# Altium PCB COMMS_ECU_revA.PcbDoc (part 2 of 6)
Units mm, origin at the board's own origin, x right, y up, seen from the top; angles counter-clockwise.
Board outline 370 x 261 mm, 6 copper layers (Top Layer, Mid Layer 1, Mid Layer 2, Mid Layer 3, Mid Layer 4, Bottom Layer), stack 1.538 mm thick; 739 components, 500 nets, 2454 pads, 325 vias.
Unrouted connection lines stored in the file: 1573.
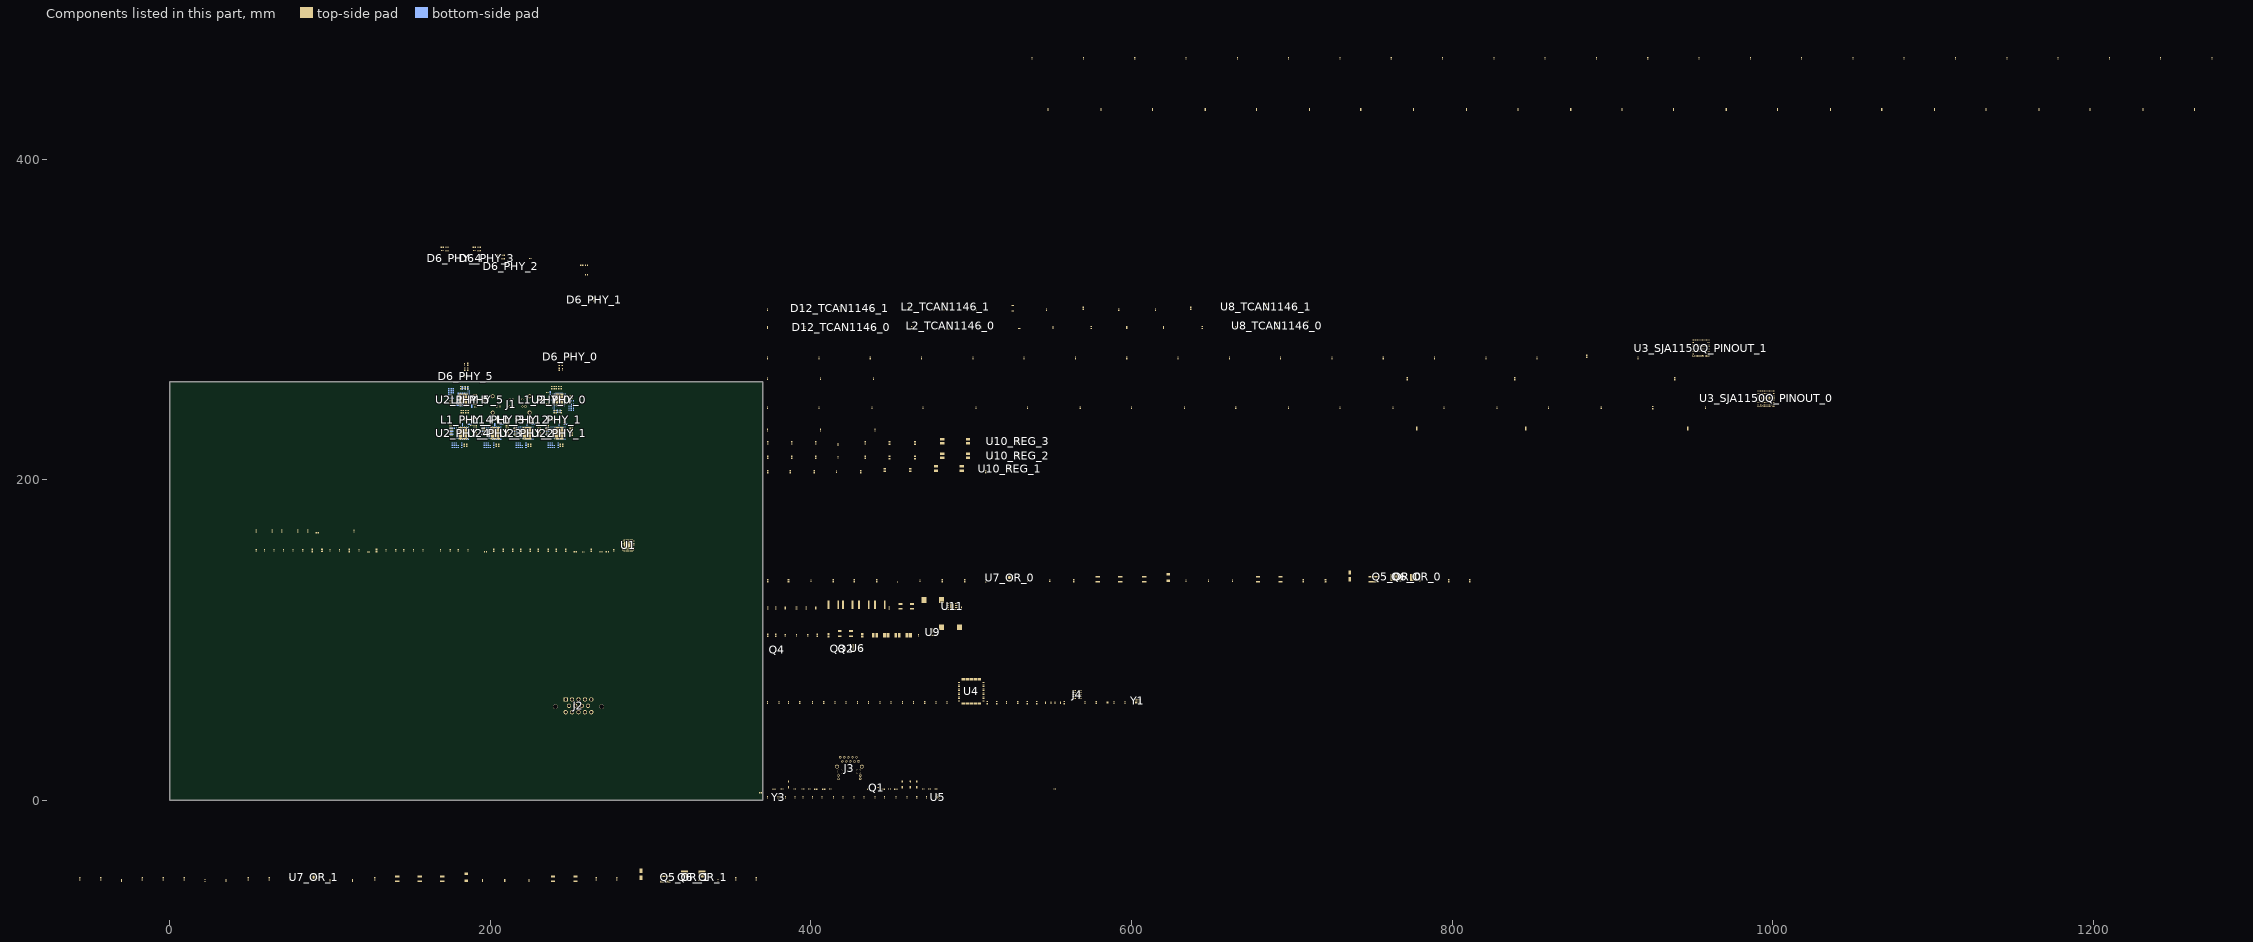
[diagram p2: the components of this part, seen from the top]

## Components (designator, comment, footprint, x,y, rotation, side; value= is the part's Value field where it differs from the comment) (continued)
C89_SJA1150Q_PINOUT_1 "100n" FP-0402-L_1_0_0_05-W_0_5-IPC_A 826.001,463.001 r90 top (schematic designator C89)
C90_SJA1150Q_PINOUT_0 "100n" FP-0402-L_1_0_0_05-W_0_5-IPC_A 874.001,431 r90 top (schematic designator C90)
C90_SJA1150Q_PINOUT_1 "100n" FP-0402-L_1_0_0_05-W_0_5-IPC_A 858.001,463.001 r90 top (schematic designator C90)
C91_SJA1150Q_PINOUT_0 "100n" FP-0402-L_1_0_0_05-W_0_5-IPC_A 906.001,431 r90 top (schematic designator C91)
C91_SJA1150Q_PINOUT_1 "100n" FP-0402-L_1_0_0_05-W_0_5-IPC_A 890.001,463.001 r90 top (schematic designator C91)
C92_SJA1150Q_PINOUT_0 "1u" FP-0402-L_1_0_0_05-W_0_5-IPC_A 678.001,431 r90 top (schematic designator C92)
C92_SJA1150Q_PINOUT_1 "1u" FP-0402-L_1_0_0_05-W_0_5-IPC_A 666.001,463.001 r90 top (schematic designator C92)
C93_SJA1150Q_PINOUT_0 "100n" FP-0402-L_1_0_0_05-W_0_5-IPC_A 711.001,431 r90 top (schematic designator C93)
C93_SJA1150Q_PINOUT_1 "100n" FP-0402-L_1_0_0_05-W_0_5-IPC_A 698.001,463.001 r90 top (schematic designator C93)
C94_SJA1150Q_PINOUT_0 "100n" FP-0402-L_1_0_0_05-W_0_5-IPC_A 743.001,431 r90 top (schematic designator C94)
C94_SJA1150Q_PINOUT_1 "100n" FP-0402-L_1_0_0_05-W_0_5-IPC_A 730.001,463.001 r90 top (schematic designator C94)
C95_SJA1150Q_PINOUT_0 "100n" FP-0402-L_1_0_0_05-W_0_5-IPC_A 776.001,431 r90 top (schematic designator C95)
C95_SJA1150Q_PINOUT_1 "100n" FP-0402-L_1_0_0_05-W_0_5-IPC_A 762.001,463.001 r90 top (schematic designator C95)
C96_SJA1150Q_PINOUT_0 "1u" FP-0402-L_1_0_0_05-W_0_5-IPC_A 548.001,431 r90 top (schematic designator C96)
C96_SJA1150Q_PINOUT_1 "1u" FP-0402-L_1_0_0_05-W_0_5-IPC_A 538.001,463.001 r90 top (schematic designator C96)
C97_SJA1150Q_PINOUT_0 "100n" FP-0402-L_1_0_0_05-W_0_5-IPC_A 581.001,431 r90 top (schematic designator C97)
C97_SJA1150Q_PINOUT_1 "100n" FP-0402-L_1_0_0_05-W_0_5-IPC_A 570.001,463.001 r90 top (schematic designator C97)
C98_SJA1150Q_PINOUT_0 "100n" FP-0402-L_1_0_0_05-W_0_5-IPC_A 613.001,431 r90 top (schematic designator C98)
C98_SJA1150Q_PINOUT_1 "100n" FP-0402-L_1_0_0_05-W_0_5-IPC_A 602.001,463.001 r90 top (schematic designator C98)
C99_SJA1150Q_PINOUT_0 "100n" FP-0402-L_1_0_0_05-W_0_5-IPC_A 646.001,431 r90 top (schematic designator C99)
C99_SJA1150Q_PINOUT_1 "100n" FP-0402-L_1_0_0_05-W_0_5-IPC_A 634.001,463.001 r90 top (schematic designator C99)
C100_SJA1150Q_PINOUT_0 "100n" FP-0402-L_1_0_0_05-W_0_5-IPC_A 373.001,231 r90 top (schematic designator C100)
C100_SJA1150Q_PINOUT_1 "100n" FP-0402-L_1_0_0_05-W_0_5-IPC_A 373.001,263.001 r90 top (schematic designator C100)
C101_SJA1150Q_PINOUT_0 "100n" FP-0402-L_1_0_0_05-W_0_5-IPC_A 406.001,231 r90 top (schematic designator C101)
C101_SJA1150Q_PINOUT_1 "100n" FP-0402-L_1_0_0_05-W_0_5-IPC_A 406.001,263.001 r90 top (schematic designator C101)
C102_SJA1150Q_PINOUT_0 "100n" FP-0402-L_1_0_0_05-W_0_5-IPC_A 440.001,231 r90 top (schematic designator C102)
C102_SJA1150Q_PINOUT_1 "100n" FP-0402-L_1_0_0_05-W_0_5-IPC_A 439.001,263.001 r90 top (schematic designator C102)
C110 "30p" FP-0402-L_1_0_0_05-W_0_5-IPC_A 589.001,61 r90 top
C111 "30p" FP-0402-L_1_0_0_05-W_0_5-IPC_A 596.001,61 r90 top
C112 "18p" FP-0402-L_1_0_0_05-W_0_5-IPC_A 571.001,61 r90 top
C113 "18p" FP-0402-L_1_0_0_05-W_0_5-IPC_A 578.001,61 r90 top
C114 "100n" FP-0402-L_1_0_0_05-W_0_5-IPC_A 522.001,61 r90 top
C115 "100n" FP-0402-L_1_0_0_05-W_0_5-IPC_A 529.001,61 r90 top
C116 "1u" FP-0402-L_1_0_0_05-W_0_5-IPC_A 478.001,61 r90 top
C117 "100n" FP-0402-L_1_0_0_05-W_0_5-IPC_A 485.001,61 r90 top
C118 "100n" FP-0402-L_1_0_0_05-W_0_5-IPC_A 471.001,61 r90 top
C119 "100n" FP-0402-L_1_0_0_05-W_0_5-IPC_A 464.001,61 r90 top
C120 "100n" FP-0402-L_1_0_0_05-W_0_5-IPC_A 450.001,61 r90 top
C121 "100n" FP-0402-L_1_0_0_05-W_0_5-IPC_A 443.001,61 r90 top
C122 "1u" FP-0402-L_1_0_0_05-W_0_5-IPC_A 429.001,61 r90 top
C123 "100n" FP-0402-L_1_0_0_05-W_0_5-IPC_A 436.001,61 r90 top
C124 "2.2u" FP-0402-L_1_0_0_05-W_0_5-IPC_A 415.001,61 r90 top
C125 "100n" FP-0402-L_1_0_0_05-W_0_5-IPC_A 422.001,61 r90 top
C126 "2.2u" FP-0402-L_1_0_0_05-W_0_5-IPC_A 401.001,61 r90 top
C127 "100n" FP-0402-L_1_0_0_05-W_0_5-IPC_A 408.001,61 r90 top
C128 "1u" FP-0402-L_1_0_0_05-W_0_5-IPC_A 386.001,61 r90 top
C129 "100n" FP-0402-L_1_0_0_05-W_0_5-IPC_A 393.001,61 r90 top
C130 "1u" FP-0402-L_1_0_0_05-W_0_5-IPC_A 373.001,61 r90 top
C131 "100n" FP-0402-L_1_0_0_05-W_0_5-IPC_A 380.001,61 r90 top
C132 "1u" FP-0402-L_1_0_0_05-W_0_5-IPC_A 446.001,2 r90 top
C133 "10n" FP-0402-L_1_0_0_05-W_0_5-IPC_A 453.001,2 r90 top
C134 "10n" FP-0402-L_1_0_0_05-W_0_5-IPC_A 433.001,2 r90 top
C135 "10n" FP-0402-L_1_0_0_05-W_0_5-IPC_A 420.001,2 r90 top
C136 "10n" FP-0402-L_1_0_0_05-W_0_5-IPC_A 407.001,2 r90 top
C137 "100n" FP-0402-L_1_0_0_05-W_0_5-IPC_A 373.001,2 r90 top
C138 "100n" FP-0402-L_1_0_0_05-W_0_5-IPC_A 115.001,168 r90 top
C139_OR_0 "EEE-FK1H100UR" FP-FKC-MFG 736.001,140 r90 top (schematic designator C139)
C139_OR_1 "EEE-FK1H100UR" FP-FKC-MFG 294.001,-46 r90 top (schematic designator C139)
C140_OR_0 "12103D106KAT2A" FP-1210-L_3_3_0_4-W_2_5_0-MFG 679.001,138 r90 top (schematic designator C140)
C140_OR_1 "12103D106KAT2A" FP-1210-L_3_3_0_4-W_2_5_0-MFG 239.001,-49 r90 top (schematic designator C140)
C141_OR_0 "12103D106KAT2A" FP-1210-L_3_3_0_4-W_2_5_0-MFG 693.001,138 r90 top (schematic designator C141)
C141_OR_1 "12103D106KAT2A" FP-1210-L_3_3_0_4-W_2_5_0-MFG 253.001,-49 r90 top (schematic designator C141)
C142_OR_0 "10n" FP-0402-L_1_0_0_05-W_0_5-IPC_A 663.001,137 r90 top (schematic designator C142)
C142_OR_1 "10n" FP-0402-L_1_0_0_05-W_0_5-IPC_A 224.001,-50 r90 top (schematic designator C142)
C143_OR_0 "100n" FP-0402-L_1_0_0_05-W_0_5-IPC_A 634.001,137 r90 top (schematic designator C143)
C143_OR_1 "100n" FP-0402-L_1_0_0_05-W_0_5-IPC_A 195.001,-50 r90 top (schematic designator C143)
C144_OR_0 "100n" FP-0402-L_1_0_0_05-W_0_5-IPC_A 648.001,137 r90 top (schematic designator C144)
C144_OR_1 "100n" FP-0402-L_1_0_0_05-W_0_5-IPC_A 209.001,-50 r90 top (schematic designator C144)
C145_OR_0 "AC1210KKX7R0BB104" FP-AC1210-0_85-MFG 579.001,138 r90 top value="100 nF" (schematic designator C145)
C145_OR_1 "AC1210KKX7R0BB104" FP-AC1210-0_85-MFG 142.001,-49 r90 top value="100 nF" (schematic designator C145)
C146_OR_0 "AC1210KKX7R0BB104" FP-AC1210-0_85-MFG 593.001,138 r90 top value="100 nF" (schematic designator C146)
C146_OR_1 "AC1210KKX7R0BB104" FP-AC1210-0_85-MFG 156.001,-49 r90 top value="100 nF" (schematic designator C146)
C147_OR_0 "AC1210KKX7R0BB104" FP-AC1210-0_85-MFG 608.001,138 r90 top value="100 nF" (schematic designator C147)
C147_OR_1 "AC1210KKX7R0BB104" FP-AC1210-0_85-MFG 170.001,-49 r90 top value="100 nF" (schematic designator C147)
C148_OR_0 "10n" FP-0402-L_1_0_0_05-W_0_5-IPC_A 549.001,137 r90 top (schematic designator C148)
C148_OR_1 "10n" FP-0402-L_1_0_0_05-W_0_5-IPC_A 114.001,-50 r90 top (schematic designator C148)
C149_OR_0 "10n" FP-0402-L_1_0_0_05-W_0_5-IPC_A 535.001,137 r90 top (schematic designator C149)
C149_OR_1 "10n" FP-0402-L_1_0_0_05-W_0_5-IPC_A 100.001,-50 r90 top (schematic designator C149)
C150_OR_0 "100n" FP-0402-L_1_0_0_05-W_0_5-IPC_A 468.001,137 r90 top (schematic designator C150)
C150_OR_1 "100n" FP-0402-L_1_0_0_05-W_0_5-IPC_A 35.001,-50 r90 top (schematic designator C150)
C151_OR_0 "100n" FP-0402-L_1_0_0_05-W_0_5-IPC_A 400.001,137 r90 top (schematic designator C151)
C151_OR_1 "100n" FP-0402-L_1_0_0_05-W_0_5-IPC_A -29.999,-50 r90 top (schematic designator C151)
C152_TCAN1146_0 "100n" FP-0402-L_1_0_0_05-W_0_5-IPC_A 665.001,295.001 r90 top (schematic designator C152)
C152_TCAN1146_1 "100n" FP-0402-L_1_0_0_05-W_0_5-IPC_A 659.001,306.001 r90 top (schematic designator C152)
C153_TCAN1146_0 "100n" FP-0402-L_1_0_0_05-W_0_5-IPC_A 597.001,295.001 r90 top (schematic designator C153)
C153_TCAN1146_1 "100n" FP-0402-L_1_0_0_05-W_0_5-IPC_A 592.001,306.001 r90 top (schematic designator C153)
C154_TCAN1146_0 "100n" FP-0402-L_1_0_0_05-W_0_5-IPC_A 620.001,295.001 r90 top (schematic designator C154)
C154_TCAN1146_1 "100n" FP-0402-L_1_0_0_05-W_0_5-IPC_A 615.001,306.001 r90 top (schematic designator C154)
C155_TCAN1146_0 "100n" FP-0402-L_1_0_0_05-W_0_5-IPC_A 551.001,295.001 r90 top (schematic designator C155)
C155_TCAN1146_1 "100n" FP-0402-L_1_0_0_05-W_0_5-IPC_A 547.001,306.001 r90 top (schematic designator C155)
C156_TCAN1146_0 "DNP" FP-0402-L_1_0_0_05-W_0_5-IPC_A 506.001,295.001 r90 top (schematic designator C156)
C156_TCAN1146_1 "DNP" FP-0402-L_1_0_0_05-W_0_5-IPC_A 503.001,306.001 r90 top (schematic designator C156)
C157_TCAN1146_0 "100n" FP-0402-L_1_0_0_05-W_0_5-IPC_A 440.001,295.001 r90 top (schematic designator C157)
C157_TCAN1146_1 "100n" FP-0402-L_1_0_0_05-W_0_5-IPC_A 438.001,306.001 r90 top (schematic designator C157)
C158_TCAN1146_0 "DNP" FP-0402-L_1_0_0_05-W_0_5-IPC_A 373.001,295.001 r90 top (schematic designator C158)
C158_TCAN1146_1 "DNP" FP-0402-L_1_0_0_05-W_0_5-IPC_A 373.001,306.001 r90 top (schematic designator C158)
C159 "100n" FP-0402-L_1_0_0_05-W_0_5-IPC_A 467.001,103 r90 top
C160 "GRM32ER61C476KE15L" FP-GRM32E-0_3-0_2-IPC_C 440.001,103 r0 top
C161 "GRM32ER61C476KE15L" FP-GRM32E-0_3-0_2-IPC_C 447.001,103 r0 top
C162 "GRM32ER61C476KE15L" FP-GRM32E-0_3-0_2-IPC_C 454.001,103 r0 top
C163 "DNP" FP-GRM32E-0_3-0_2-IPC_C 461.001,103 r0 top
C164 "C3225X7R1H106M250AC" FP-C3225-250-0_4-MFG 418.001,104 r90 top
C165 "C3225X7R1H106M250AC" FP-C3225-250-0_4-MFG 425.001,104 r90 top
C166 "08055C474J4Z2A" FP-0805-L_2_01_0_2-W_1_25-IPC_B 432.001,103 r90 top
C167 "08055C474J4Z2A" FP-0805-L_2_01_0_2-W_1_25-IPC_B 411.001,103 r90 top
C168 "100n" FP-0402-L_1_0_0_05-W_0_5-IPC_A 391.001,103 r90 top
C169 "1u" FP-0402-L_1_0_0_05-W_0_5-IPC_A 384.001,103 r90 top
C170_REG_1 "C0805C475J4RACAUTO" FP-C0805C475J4RACAUTO-MFG 446.001,206 r90 top (schematic designator C170)
C170_REG_2 "C0805C475J4RACAUTO" FP-C0805C475J4RACAUTO-MFG 449.001,214 r90 top (schematic designator C170)
C170_REG_3 "C0805C475J4RACAUTO" FP-C0805C475J4RACAUTO-MFG 449.001,223 r90 top (schematic designator C170)
C171_REG_1 "DNP" FP-C0805C475J4RACAUTO-MFG 462.001,206 r90 top (schematic designator C171)
C171_REG_2 "DNP" FP-C0805C475J4RACAUTO-MFG 465.001,214 r90 top (schematic designator C171)
C171_REG_3 "DNP" FP-C0805C475J4RACAUTO-MFG 465.001,223 r90 top (schematic designator C171)
C172_REG_1 "HMK325B7105KN-T" FP-1210-L_3_2_0_3-W_2_5_0-IPC_B 478.001,207 r90 top (schematic designator C172)
C172_REG_2 "HMK325B7105KN-T" FP-1210-L_3_2_0_3-W_2_5_0-IPC_B 482.001,215 r90 top (schematic designator C172)
C172_REG_3 "HMK325B7105KN-T" FP-1210-L_3_2_0_3-W_2_5_0-IPC_B 482.001,224 r90 top (schematic designator C172)
C173_REG_1 "DNP" FP-1210-L_3_2_0_3-W_2_5_0-IPC_B 494.001,207 r90 top (schematic designator C173)
C173_REG_2 "DNP" FP-1210-L_3_2_0_3-W_2_5_0-IPC_B 498.001,215 r90 top (schematic designator C173)
C173_REG_3 "DNP" FP-1210-L_3_2_0_3-W_2_5_0-IPC_B 498.001,224 r90 top (schematic designator C173)
C174_REG_1 "DNP" FP-0402-L_1_0_0_05-W_0_5-IPC_A 416.001,205 r90 top (schematic designator C174)
C174_REG_2 "DNP" FP-0402-L_1_0_0_05-W_0_5-IPC_A 417.001,214 r90 top (schematic designator C174)
C174_REG_3 "DNP" FP-0402-L_1_0_0_05-W_0_5-IPC_A 417.001,222 r90 top (schematic designator C174)
C175 "100n" FP-0402-L_1_0_0_05-W_0_5-IPC_A 494.001,120 r90 top
C176 "12103D106KAT2A" FP-1210-L_3_3_0_4-W_2_5_0-MFG 456.001,121 r90 top
C177 "12103D106KAT2A" FP-1210-L_3_3_0_4-W_2_5_0-MFG 463.001,121 r90 top
C178 "DNP" FP-0402-L_1_0_0_05-W_0_5-IPC_A 403.001,120 r90 top
C179 "CGA9N3X7R1C476M230KB" FP-CGA9P-IPC_A 414.001,122 r0 top
C180 "CGA9N3X7R1C476M230KB" FP-CGA9P-IPC_A 423.001,122 r0 top
C181 "CGA9N3X7R1C476M230KB" FP-CGA9P-IPC_A 433.001,122 r0 top
C182 "DNP" FP-CGA9P-IPC_A 443.001,122 r0 top
C183 "100n" FP-0402-L_1_0_0_05-W_0_5-IPC_A 384.001,120 r90 top
D1 "1N4148W-TP" FP-SOD-123-IPC_A 466.001,10 r90 top
D2 "1N4148W-TP" FP-SOD-123-IPC_A 462.001,10 r90 top
D3 "1N4148W-TP" FP-SOD-123-IPC_A 457.001,10 r90 top
D4 "MM5Z3V3T1G" ONSC-SOD-523-2-502-01_V 449.001,7 r0 top
D5 "1N4148W-TP" FP-SOD-123-IPC_A 386.001,10 r90 top
D6_PHY_0 "150066RG54050" WL-SBCD_0606 249.75,276.75 r90 top (schematic designator D6)
D6_PHY_1 "150066RG54050" WL-SBCD_0606 264.75,312.389 r0 top (schematic designator D6)
D6_PHY_2 "150066RG54050" WL-SBCD_0606 212.75,333.25 r0 top (schematic designator D6)
D6_PHY_3 "150066RG54050" WL-SBCD_0606 197.75,338.25 r0 top (schematic designator D6)
D6_PHY_4 "150066RG54050" WL-SBCD_0606 177.75,338.25 r0 top (schematic designator D6)
D6_PHY_5 "150066RG54050" WL-SBCD_0606 184.8,264.55 r270 top (schematic designator D6)
D7 "MM5Z3V3T1G" ONSC-SOD-523-2-502-01_V 76.001,167 r0 top
D8_OR_0 "DNP/MM5Z3V3T1G" ONSC-SOD-523-2-502-01_V 786.001,137 r90 top (schematic designator D8)
D8_OR_1 "DNP/MM5Z3V3T1G" ONSC-SOD-523-2-502-01_V 342.001,-50 r90 top (schematic designator D8)
D9_OR_0 "SMBJ33CA-TR" FP-SMB-CA-MFG 623.001,139 r90 top (schematic designator D9)
D9_OR_1 "SMBJ33CA-TR" FP-SMB-CA-MFG 185.001,-48 r90 top (schematic designator D9)
D10_OR_0 "DNP/MM5Z3V3T1G" ONSC-SOD-523-2-502-01_V 454.001,137 r90 top (schematic designator D10)
D10_OR_1 "DNP/MM5Z3V3T1G" ONSC-SOD-523-2-502-01_V 22.001,-50 r90 top (schematic designator D10)
D11_TCAN1146_0 "1N4148W-TP" FP-SOD-123-IPC_A 710.001,297.001 r90 top (schematic designator D11)
D11_TCAN1146_1 "1N4148W-TP" FP-SOD-123-IPC_A 702.001,308.001 r90 top (schematic designator D11)
D12_TCAN1146_0 "ESDCAN02-2BWY" FP-SOT323-3L-MFG 419.001,295.001 r90 top value=3pF (schematic designator D12)
D12_TCAN1146_1 "ESDCAN02-2BWY" FP-SOT323-3L-MFG 418.001,307.001 r90 top value=3pF (schematic designator D12)
FB3 "BLM18KG331SH1D" FP-BLM18-0_15-t0_8-IPC_B 129.001,156 r90 top
FB4 "BLM18KG331SH1D" FP-BLM18-0_15-t0_8-IPC_B 112.001,156 r90 top
FB5 "BLM18KG331SH1D" FP-BLM18-0_15-t0_8-IPC_B 89.001,156 r90 top
FB6_PHY_0 "BLM18KG331SH1D" FP-BLM18-0_15-t0_8-IPC_B 243.5,242.75 r90 bottom (schematic designator FB6)
FB6_PHY_1 "BLM18KG331SH1D" FP-BLM18-0_15-t0_8-IPC_B 235.75,228.5 r0 bottom (schematic designator FB6)
FB6_PHY_2 "BLM18KG331SH1D" FP-BLM18-0_15-t0_8-IPC_B 215.75,228.5 r0 bottom (schematic designator FB6)
FB6_PHY_3 "BLM18KG331SH1D" FP-BLM18-0_15-t0_8-IPC_B 195.75,228.5 r0 bottom (schematic designator FB6)
FB6_PHY_4 "BLM18KG331SH1D" FP-BLM18-0_15-t0_8-IPC_B 175.75,228.5 r0 bottom (schematic designator FB6)
FB6_PHY_5 "BLM18KG331SH1D" FP-BLM18-0_15-t0_8-IPC_B 182.5,257.25 r270 bottom (schematic designator FB6)
FB8_PHY_0 "BLM18KG331SH1D" FP-BLM18-0_15-t0_8-IPC_B 241.75,242.75 r90 bottom (schematic designator FB8)
FB8_PHY_1 "BLM18KG331SH1D" FP-BLM18-0_15-t0_8-IPC_B 235.75,230.25 r0 bottom (schematic designator FB8)
FB8_PHY_2 "BLM18KG331SH1D" FP-BLM18-0_15-t0_8-IPC_B 215.75,230.25 r0 bottom (schematic designator FB8)
FB8_PHY_3 "BLM18KG331SH1D" FP-BLM18-0_15-t0_8-IPC_B 195.75,230.25 r0 bottom (schematic designator FB8)
FB8_PHY_4 "BLM18KG331SH1D" FP-BLM18-0_15-t0_8-IPC_B 175.75,230.25 r0 bottom (schematic designator FB8)
FB8_PHY_5 "BLM18KG331SH1D" FP-BLM18-0_15-t0_8-IPC_B 184.25,257.25 r270 bottom (schematic designator FB8)
FB10_PHY_0 "BLM18KG331SH1D" FP-BLM18-0_15-t0_8-IPC_B 237.5,254 r270 bottom (schematic designator FB10)
FB10_PHY_1 "BLM18KG331SH1D" FP-BLM18-0_15-t0_8-IPC_B 247,234.5 r180 bottom (schematic designator FB10)
FB10_PHY_2 "BLM18KG331SH1D" FP-BLM18-0_15-t0_8-IPC_B 227,234.5 r180 bottom (schematic designator FB10)
FB10_PHY_3 "BLM18KG331SH1D" FP-BLM18-0_15-t0_8-IPC_B 207,234.5 r180 bottom (schematic designator FB10)
FB10_PHY_4 "BLM18KG331SH1D" FP-BLM18-0_15-t0_8-IPC_B 187,234.5 r180 bottom (schematic designator FB10)
FB10_PHY_5 "BLM18KG331SH1D" FP-BLM18-0_15-t0_8-IPC_B 188.5,246 r90 bottom (schematic designator FB10)
FB11_PHY_0 "BLM18KG331SH1D" FP-BLM18-0_15-t0_8-IPC_B 240,242.75 r90 bottom (schematic designator FB11)
FB11_PHY_1 "BLM18KG331SH1D" FP-BLM18-0_15-t0_8-IPC_B 235.75,232 r0 bottom (schematic designator FB11)
FB11_PHY_2 "BLM18KG331SH1D" FP-BLM18-0_15-t0_8-IPC_B 215.75,232 r0 bottom (schematic designator FB11)
FB11_PHY_3 "BLM18KG331SH1D" FP-BLM18-0_15-t0_8-IPC_B 195.75,232 r0 bottom (schematic designator FB11)
FB11_PHY_4 "BLM18KG331SH1D" FP-BLM18-0_15-t0_8-IPC_B 175.75,232 r0 bottom (schematic designator FB11)
FB11_PHY_5 "BLM18KG331SH1D" FP-BLM18-0_15-t0_8-IPC_B 186,257.25 r270 bottom (schematic designator FB11)
FB13_SJA1150Q_PINOUT_0 "BLM18KG331SH1D" FP-BLM18-0_15-t0_8-IPC_B 947.001,232 r90 top (schematic designator FB13)
FB13_SJA1150Q_PINOUT_1 "BLM18KG331SH1D" FP-BLM18-0_15-t0_8-IPC_B 939.001,263.001 r90 top (schematic designator FB13)
FB16_SJA1150Q_PINOUT_0 "BLM18KG331SH1D" FP-BLM18-0_15-t0_8-IPC_B 846.001,232 r90 top (schematic designator FB16)
FB16_SJA1150Q_PINOUT_1 "BLM18KG331SH1D" FP-BLM18-0_15-t0_8-IPC_B 839.001,263.001 r90 top (schematic designator FB16)
FB19_SJA1150Q_PINOUT_0 "BLM18KG331SH1D" FP-BLM18-0_15-t0_8-IPC_B 778.001,232 r90 top (schematic designator FB19)
FB19_SJA1150Q_PINOUT_1 "BLM18KG331SH1D" FP-BLM18-0_15-t0_8-IPC_B 772.001,263.001 r90 top (schematic designator FB19)
FB23 "BLM15PX601SN1D" FP-BLM15-0_05-IPC_A 457.001,61 r90 top
J1 "E6S20F-40MT5-A" FP-E6S20F-40MT5-A-MFG 213,251 r180 top
J2 "776266-1" 776266-1-Footprint-1 255,59 r0 top
J3 "RJMG201K21120FR" RJMG201K21120FR-Footprint-1 424.001,18 r0 top
J4 "3220-10-0300-00" 3220-10-0300-00-Footprint-1 566.001,66 r0 top
L1_PHY_0 "ACT1210G-800-2P-TL10" FP-ACT1210G-800-2P-TL10-MFG 234,250 r180 top (schematic designator L1)
L1_PHY_1 "ACT1210G-800-2P-TL10" FP-ACT1210G-800-2P-TL10-MFG 240.5,237.5 r180 top (schematic designator L1)
L1_PHY_2 "ACT1210G-800-2P-TL10" FP-ACT1210G-800-2P-TL10-MFG 220.5,237.5 r180 top (schematic designator L1)
L1_PHY_3 "ACT1210G-800-2P-TL10" FP-ACT1210G-800-2P-TL10-MFG 205.5,237.5 r0 top (schematic designator L1)
L1_PHY_4 "ACT1210G-800-2P-TL10" FP-ACT1210G-800-2P-TL10-MFG 185.5,237.5 r0 top (schematic designator L1)
L1_PHY_5 "ACT1210G-800-2P-TL10" FP-ACT1210G-800-2P-TL10-MFG 192,250 r0 top (schematic designator L1)
L2_TCAN1146_0 "SRF4532-510Y" FP-SRF4532-MFG 487.001,296.001 r90 top (schematic designator L2)
L2_TCAN1146_1 "SRF4532-510Y" FP-SRF4532-MFG 484.001,308.001 r90 top (schematic designator L2)
L3 "74437377022" WE-LHMI_1335 487.001,108 r0 top
L4 "74437377022" WE-LHMI_1335 476.001,125 r0 top
Q1 "BSS138W-7-F" DIOD-SOT323-3_V 441.001,8 r0 top
Q2 "SISH615ADN-T1-GE3" SISH615ADN-T1-GE3-Footprint-1 422.001,95 r0 top
Q3 "SISH615ADN-T1-GE3" SISH615ADN-T1-GE3-Footprint-1 417.001,95 r0 top
Q4 "BSS138W-7-F" DIOD-SOT323-3_V 379.001,94 r0 top
Q5_OR_0 "ISC011N06LM5ATMA1" FP-PG-TDSON-8-MFG 765.001,139 r90 top (schematic designator Q5)
Q5_OR_1 "ISC011N06LM5ATMA1" FP-PG-TDSON-8-MFG 321.001,-47 r0 top (schematic designator Q5)
Q6_OR_0 "ISC011N06LM5ATMA1" FP-PG-TDSON-8-MFG 777.001,139 r90 top (schematic designator Q6)
Q6_OR_1 "ISC011N06LM5ATMA1" FP-PG-TDSON-8-MFG 332.001,-47 r0 top (schematic designator Q6)
R1 "100k" R0603B 453.001,7 r0 top
R2 "1k" R0603B 445.001,7 r0 top
R3 "100k" R0603B 436.001,7 r0 top
R4 "1k" R0603B 408.001,7 r0 top
R5 "1k" R0603B 403.001,7 r0 top
R6 "1k" R0603B 377.001,7 r0 top
R7 "1k" R0603B 368.75,4.75 r0 top
R8 "100k" R0603B 273.001,155 r0 top
R9 "4.7k" R0603B 269.001,155 r0 top
R10 "DNP" R0603B 263.001,156 r90 top
R11 "4.7k" R0603B 253.001,155 r0 top
R12 "DNP" R0603B 247.001,156 r90 top
R13 "4.7k" R0603B 241.001,156 r90 top
R14 "1k" R0603B 236.001,156 r90 top
R15 "DNP" R0603B 230.001,156 r90 top
R16 "1k" R0603B 225.001,156 r90 top
R17 "1k" R0603B 219.001,156 r90 top
R18 "1k" R0603B 214.001,156 r90 top
R19 "1k" R0603B 208.001,156 r90 top
R20 "1k" R0603B 202.001,156 r90 top
R21 "1k" R0603B 197.001,155 r0 top
R22 "6.04k" R0603B 95.001,156 r90 top
R23_PHY_0 "1k" R0603B 243.001,271.979 r90 top value=100k (schematic designator R23)
R23_PHY_1 "1k" R0603B 259.979,333.885 r0 top value=100k (schematic designator R23)
R23_PHY_2 "1k" R0603B 207.979,339.999 r0 top value=100k (schematic designator R23)
R23_PHY_3 "1k" R0603B 192.979,344.999 r0 top value=100k (schematic designator R23)
R23_PHY_4 "1k" R0603B 172.979,344.999 r0 top value=100k (schematic designator R23)
R23_PHY_5 "1k" R0603B 185.999,269.021 r270 top value=100k (schematic designator R23)
R24_PHY_0 "1k" R0603B 245,271.979 r90 top value=100k (schematic designator R24)
R24_PHY_1 "1k" R0603B 259.979,327.889 r0 top value=100k (schematic designator R24)
R24_PHY_2 "1k" R0603B 207.979,338 r0 top value=100k (schematic designator R24)
R24_PHY_3 "1k" R0603B 192.979,343 r0 top value=100k (schematic designator R24)
R24_PHY_4 "1k" R0603B 172.979,343 r0 top value=100k (schematic designator R24)
R24_PHY_5 "1k" R0603B 184,269.021 r270 top value=100k (schematic designator R24)
R25_PHY_0 "100k" R0603B 243,268.979 r90 top (schematic designator R25)
R25_PHY_1 "100k" R0603B 256.979,333.889 r0 top (schematic designator R25)
R25_PHY_2 "100k" R0603B 204.979,340 r0 top (schematic designator R25)
R25_PHY_3 "100k" R0603B 189.979,345 r0 top (schematic designator R25)
R25_PHY_4 "100k" R0603B 169.979,345 r0 top (schematic designator R25)
R25_PHY_5 "100k" R0603B 186,272.021 r270 top (schematic designator R25)
R26_PHY_0 "100k" R0603B 238.25,257.5 r270 top (schematic designator R26)
R26_PHY_1 "100k" R0603B 246,236.5 r270 top (schematic designator R26)
R26_PHY_2 "100k" R0603B 226,236.5 r270 top (schematic designator R26)
R26_PHY_3 "100k" R0603B 210.5,233.75 r180 top (schematic designator R26)
R26_PHY_4 "100k" R0603B 190.5,233.75 r180 top (schematic designator R26)
R26_PHY_5 "100k" R0603B 190.5,247 r180 top (schematic designator R26)
R27_PHY_0 "100k" R0603B 241.25,242.5 r270 top (schematic designator R27)
R27_PHY_1 "100k" R0603B 235.5,230.75 r180 top (schematic designator R27)
R27_PHY_2 "100k" R0603B 215.5,230.75 r180 top (schematic designator R27)
R27_PHY_3 "100k" R0603B 195.5,230.75 r180 top (schematic designator R27)
R27_PHY_4 "100k" R0603B 175.5,230.75 r180 top (schematic designator R27)
R27_PHY_5 "100k" R0603B 184.5,257.5 r90 top (schematic designator R27)
R28_PHY_0 "4.7k" R0603B 244.25,242.5 r270 top value=100k (schematic designator R28)
R28_PHY_1 "4.7k" R0603B 235.5,227.75 r180 top value=100k (schematic designator R28)
R28_PHY_2 "4.7k" R0603B 215.5,227.75 r180 top value=100k (schematic designator R28)
R28_PHY_3 "4.7k" R0603B 195.5,227.75 r180 top value=100k (schematic designator R28)
R28_PHY_4 "4.7k" R0603B 175.5,227.75 r180 top value=100k (schematic designator R28)
R28_PHY_5 "4.7k" R0603B 181.5,257.5 r90 top value=100k (schematic designator R28)
R29_PHY_0 "10k" R0603B 239.75,257.5 r90 top value=100k (schematic designator R29)
R29_PHY_1 "10k" R0603B 250.5,232.25 r0 top value=100k (schematic designator R29)
R29_PHY_2 "10k" R0603B 230.5,232.25 r0 top value=100k (schematic designator R29)
R29_PHY_3 "10k" R0603B 210.5,232.25 r0 top value=100k (schematic designator R29)
R29_PHY_4 "10k" R0603B 190.5,232.25 r0 top value=100k (schematic designator R29)
R29_PHY_5 "10k" R0603B 186.25,242.5 r270 top value=100k (schematic designator R29)
R30_PHY_0 "10k" R0603B 249.75,249.25 r0 bottom value=100k (schematic designator R30)
R30_PHY_1 "10k" R0603B 242.25,222.25 r270 bottom value=100k (schematic designator R30)
R30_PHY_2 "10k" R0603B 222.25,222.25 r270 bottom value=100k (schematic designator R30)
R30_PHY_3 "10k" R0603B 202.25,222.25 r270 bottom value=100k (schematic designator R30)
R30_PHY_4 "10k" R0603B 182.25,222.25 r270 bottom value=100k (schematic designator R30)
R30_PHY_5 "10k" R0603B 176.25,250.75 r180 bottom value=100k (schematic designator R30)
R31_PHY_0 "10k" R0603B 249.75,245.75 r180 bottom value=100k (schematic designator R31)
R31_PHY_1 "10k" R0603B 238.75,222.25 r90 bottom value=100k (schematic designator R31)
R31_PHY_2 "10k" R0603B 218.75,222.25 r90 bottom value=100k (schematic designator R31)
R31_PHY_3 "10k" R0603B 198.75,222.25 r90 bottom value=100k (schematic designator R31)
R31_PHY_4 "10k" R0603B 178.75,222.25 r90 bottom value=100k (schematic designator R31)
R31_PHY_5 "10k" R0603B 176.25,254.25 r0 bottom value=100k (schematic designator R31)
R32_PHY_0 "10k" R0603B 249.75,244.5 r180 bottom value=100k (schematic designator R32)
R32_PHY_1 "10k" R0603B 237.5,222.25 r90 bottom value=100k (schematic designator R32)
R32_PHY_2 "10k" R0603B 217.5,222.25 r90 bottom value=100k (schematic designator R32)
R32_PHY_3 "10k" R0603B 197.5,222.25 r90 bottom value=100k (schematic designator R32)
R32_PHY_4 "10k" R0603B 177.5,222.25 r90 bottom value=100k (schematic designator R32)
R32_PHY_5 "10k" R0603B 176.25,255.5 r0 bottom value=100k (schematic designator R32)
R33_PHY_0 "1k" R0603B 242.75,257.5 r270 top value=100k (schematic designator R33)
R33_PHY_1 "1k" R0603B 250.5,229.25 r180 top value=100k (schematic designator R33)
R33_PHY_2 "1k" R0603B 230.5,229.25 r180 top value=100k (schematic designator R33)
R33_PHY_3 "1k" R0603B 210.5,229.25 r180 top value=100k (schematic designator R33)
R33_PHY_4 "1k" R0603B 190.5,229.25 r180 top value=100k (schematic designator R33)
R33_PHY_5 "1k" R0603B 183.25,242.5 r90 top value=100k (schematic designator R33)
R34_PHY_0 "DNP" R0603B 251.25,245.75 r0 bottom (schematic designator R34)
R34_PHY_1 "DNP" R0603B 238.75,220.75 r270 bottom (schematic designator R34)
R34_PHY_2 "DNP" R0603B 218.75,220.75 r270 bottom (schematic designator R34)
R34_PHY_3 "DNP" R0603B 198.75,220.75 r270 bottom (schematic designator R34)
R34_PHY_4 "DNP" R0603B 178.75,220.75 r270 bottom (schematic designator R34)
R34_PHY_5 "DNP" R0603B 174.75,254.25 r180 bottom (schematic designator R34)
R35_PHY_0 "10k" R0603B 249.75,243.25 r180 bottom value=100k (schematic designator R35)
R35_PHY_1 "10k" R0603B 236.25,222.25 r90 bottom value=100k (schematic designator R35)
R35_PHY_2 "10k" R0603B 216.25,222.25 r90 bottom value=100k (schematic designator R35)
R35_PHY_3 "10k" R0603B 196.25,222.25 r90 bottom value=100k (schematic designator R35)
R35_PHY_4 "10k" R0603B 176.25,222.25 r90 bottom value=100k (schematic designator R35)
R35_PHY_5 "10k" R0603B 176.25,256.75 r0 bottom value=100k (schematic designator R35)
R36_PHY_0 "1k" R0603B 244.25,257.5 r270 top value=100k (schematic designator R36)
R36_PHY_1 "1k" R0603B 250.5,227.75 r180 top value=100k (schematic designator R36)
R36_PHY_2 "1k" R0603B 230.5,227.75 r180 top value=100k (schematic designator R36)
R36_PHY_3 "1k" R0603B 210.5,227.75 r180 top value=100k (schematic designator R36)
R36_PHY_4 "1k" R0603B 190.5,227.75 r180 top value=100k (schematic designator R36)
R36_PHY_5 "1k" R0603B 181.75,242.5 r90 top value=100k (schematic designator R36)
R37_PHY_0 "DNP" R0603B 251.25,249.25 r0 bottom (schematic designator R37)
R37_PHY_1 "DNP" R0603B 242.25,220.75 r270 bottom (schematic designator R37)
R37_PHY_2 "DNP" R0603B 222.25,220.75 r270 bottom (schematic designator R37)
R37_PHY_3 "DNP" R0603B 202.25,220.75 r270 bottom (schematic designator R37)
R37_PHY_4 "DNP" R0603B 182.25,220.75 r270 bottom (schematic designator R37)
R37_PHY_5 "DNP" R0603B 174.75,250.75 r180 bottom (schematic designator R37)
R38_PHY_0 "10k" R0603B 250.5,250.75 r0 top value=100k (schematic designator R38)
R38_PHY_1 "10k" R0603B 243.75,221.5 r270 top value=100k (schematic designator R38)
R38_PHY_2 "10k" R0603B 223.75,221.5 r270 top value=100k (schematic designator R38)
R38_PHY_3 "10k" R0603B 203.75,221.5 r270 top value=100k (schematic designator R38)
R38_PHY_4 "10k" R0603B 183.75,221.5 r270 top value=100k (schematic designator R38)
R38_PHY_5 "10k" R0603B 175.5,249.25 r180 top value=100k (schematic designator R38)
R39_PHY_0 "DNP" R0603B 251.25,243.25 r0 bottom (schematic designator R39)
R39_PHY_1 "DNP" R0603B 236.25,220.75 r270 bottom (schematic designator R39)
R39_PHY_2 "DNP" R0603B 216.25,220.75 r270 bottom (schematic designator R39)
R39_PHY_3 "DNP" R0603B 196.25,220.75 r270 bottom (schematic designator R39)
R39_PHY_4 "DNP" R0603B 176.25,220.75 r270 bottom (schematic designator R39)
R39_PHY_5 "DNP" R0603B 174.75,256.75 r180 bottom (schematic designator R39)
R40_PHY_0 "DNP" R0603B 241.25,257.5 r90 top (schematic designator R40)
R40_PHY_1 "DNP" R0603B 250.5,230.75 r0 top (schematic designator R40)
R40_PHY_2 "DNP" R0603B 230.5,230.75 r0 top (schematic designator R40)
R40_PHY_3 "DNP" R0603B 210.5,230.75 r0 top (schematic designator R40)
R40_PHY_4 "DNP" R0603B 190.5,230.75 r0 top (schematic designator R40)
R40_PHY_5 "DNP" R0603B 184.75,242.5 r270 top (schematic designator R40)
R41_PHY_0 "1k" R0603B 251.25,247 r180 bottom value=100k (schematic designator R41)
R41_PHY_1 "1k" R0603B 240,220.75 r90 bottom value=100k (schematic designator R41)
R41_PHY_2 "1k" R0603B 220,220.75 r90 bottom value=100k (schematic designator R41)
R41_PHY_3 "1k" R0603B 200,220.75 r90 bottom value=100k (schematic designator R41)
R41_PHY_4 "1k" R0603B 180,220.75 r90 bottom value=100k (schematic designator R41)
R41_PHY_5 "1k" R0603B 174.75,253 r0 bottom value=100k (schematic designator R41)
R42_PHY_0 "4.7k" R0603B 239.75,242.5 r270 top value=100k (schematic designator R42)
R42_PHY_1 "4.7k" R0603B 235.5,232.25 r180 top value=100k (schematic designator R42)
R42_PHY_2 "4.7k" R0603B 215.5,232.25 r180 top value=100k (schematic designator R42)
R42_PHY_3 "4.7k" R0603B 195.5,232.25 r180 top value=100k (schematic designator R42)
R42_PHY_4 "4.7k" R0603B 175.5,232.25 r180 top value=100k (schematic designator R42)
R42_PHY_5 "4.7k" R0603B 186,257.5 r90 top value=100k (schematic designator R42)
R43_PHY_0 "12.1k" R0603B 235.5,247 r180 top value=100k (schematic designator R43)
R43_PHY_1 "12.1k" R0603B 235.5,233.75 r180 top value=100k (schematic designator R43)
R43_PHY_2 "12.1k" R0603B 215.5,233.75 r180 top value=100k (schematic designator R43)
R43_PHY_3 "12.1k" R0603B 195.5,233.75 r180 top value=100k (schematic designator R43)
R43_PHY_4 "12.1k" R0603B 175.5,233.75 r180 top value=100k (schematic designator R43)
R43_PHY_5 "12.1k" R0603B 190.5,253 r0 top value=100k (schematic designator R43)
R44_PHY_0 "200" R0603B 250.5,252.25 r0 top value=100k (schematic designator R44)
R44_PHY_1 "200" R0603B 245.25,221.5 r270 top value=100k (schematic designator R44)
R44_PHY_2 "200" R0603B 225.25,221.5 r270 top value=100k (schematic designator R44)
R44_PHY_3 "200" R0603B 205.25,221.5 r270 top value=100k (schematic designator R44)
R44_PHY_4 "200" R0603B 185.25,221.5 r270 top value=100k (schematic designator R44)
R44_PHY_5 "200" R0603B 175.5,247.75 r180 top value=100k (schematic designator R44)
R45_SJA1150Q_PINOUT_0 "100k" R0603B 925.001,245 r90 top (schematic designator R45)
R45_SJA1150Q_PINOUT_1 "100k" R0603B 884.001,277.001 r90 top (schematic designator R45)
R46 "10k" R0603B 558.001,61 r90 top
R47 "330" R0603B 535.001,61 r90 top
R48 "330" R0603B 541.001,61 r90 top
R49 "100k" R0603B 510.001,61 r90 top value=10k
R50 "100k" R0603B 516.001,61 r90 top value=10k
R51 "33" RESC1005X40X25ML05T05 472.001,2 r90 top
R52 "33" RESC1005X40X25ML05T05 466.001,2 r90 top
R53 "33" RESC1005X40X25ML05T05 460.001,2 r90 top
R54 "33" RESC1005X40X25ML05T05 440.001,2 r90 top
R55 "33" RESC1005X40X25ML05T05 427.001,2 r90 top
R56 "33" RESC1005X40X25ML05T05 414.001,2 r90 top
R57 "33" RESC1005X40X25ML05T05 401.001,2 r90 top
R58 "33" RESC1005X40X25ML05T05 395.001,2 r90 top
R59 "33" RESC1005X40X25ML05T05 390.001,2 r90 top
R60 "0" RESC1005X40X25ML05T05 384.001,2 r90 top
R61 "100k" R0603B 92.001,167 r0 top
R62 "100k" R0603B 86.001,168 r90 top
R63 "24k" R0603B 80.001,168 r90 top
R64 "1k" R0603B 70.001,168 r90 top
R65 "1k" R0603B 64.001,168 r90 top
R66 "100k" R0603B 54.001,168 r90 top
R67_OR_0 "100k" R0603B 811.001,137 r90 top (schematic designator R67)
R67_OR_1 "100k" R0603B 366.001,-49 r90 top (schematic designator R67)
R68_OR_0 "24k" R0603B 798.001,137 r90 top (schematic designator R68)
R68_OR_1 "24k" R0603B 353.001,-49 r90 top (schematic designator R68)
R69_OR_0 "KRL6432E-M-R003-F-T1" FP-KRL6432E-MFG 751.001,138 r90 top (schematic designator R69)
R69_OR_1 "KRL6432E-M-R003-F-T1" FP-KRL6432E-MFG 309.001,-49 r90 top (schematic designator R69)
R70_OR_0 "DNP" R0603B 707.001,137 r90 top (schematic designator R70)
R70_OR_1 "DNP" R0603B 266.001,-49 r90 top (schematic designator R70)
R71_OR_0 "49.9" R0603B 721.001,137 r90 top (schematic designator R71)
R71_OR_1 "49.9" R0603B 279.001,-49 r90 top (schematic designator R71)
R72_OR_0 "10" R0603B 564.001,137 r90 top (schematic designator R72)
R72_OR_1 "10" R0603B 128.001,-49 r90 top (schematic designator R72)
R73_OR_0 "100k" R0603B 509.001,137 r90 top (schematic designator R73)
R73_OR_1 "100k" R0603B 75.001,-49 r90 top (schematic designator R73)
R74_OR_0 "100k" R0603B 496.001,137 r90 top (schematic designator R74)
R74_OR_1 "100k" R0603B 62.001,-49 r90 top (schematic designator R74)
R75_OR_0 "11.5k" R0603B 482.001,137 r90 top (schematic designator R75)
R75_OR_1 "11.5k" R0603B 49.001,-49 r90 top (schematic designator R75)
R76_OR_0 "DNP" R0603B 414.001,137 r90 top (schematic designator R76)
R76_OR_1 "DNP" R0603B -16.999,-49 r90 top (schematic designator R76)
R77_OR_0 "5.1k" R0603B 427.001,137 r90 top (schematic designator R77)
R77_OR_1 "5.1k" R0603B -3.999,-49 r90 top (schematic designator R77)
R78_OR_0 "8.2k" R0603B 441.001,137 r90 top (schematic designator R78)
R78_OR_1 "8.2k" R0603B 9.001,-49 r90 top (schematic designator R78)
R79_OR_0 "100k" R0603B 386.001,137 r90 top (schematic designator R79)
R79_OR_1 "100k" R0603B -42.999,-49 r90 top (schematic designator R79)
R80_OR_0 "3.6k" R0603B 373.001,137 r90 top (schematic designator R80)
R80_OR_1 "3.6k" R0603B -55.999,-49 r90 top (schematic designator R80)
R81_TCAN1146_0 "100k" R0603B 644.001,295.001 r90 top (schematic designator R81)
R81_TCAN1146_1 "100k" R0603B 637.001,307.001 r90 top (schematic designator R81)
R82_TCAN1146_0 "1k" R0603B 575.001,295.001 r90 top (schematic designator R82)
R82_TCAN1146_1 "1k" R0603B 570.001,307.001 r90 top (schematic designator R82)
R83_TCAN1146_0 "60.4" R0603B 463.001,295.001 r90 top (schematic designator R83)
R83_TCAN1146_1 "60.4" R0603B 461.001,307.001 r90 top (schematic designator R83)
R84_TCAN1146_0 "60.4" R0603B 396.001,295.001 r90 top (schematic designator R84)
R84_TCAN1146_1 "60.4" R0603B 395.001,307.001 r90 top (schematic designator R84)
R85 "DNP" R0603B 404.001,103 r90 top
R86 "0402 JUMPER" RESC1005X40X25ML05T05 398.001,103 r90 top
R87 "1k" R0603B 378.001,103 r90 top
R88 "1M" R0603B 373.001,103 r90 top
R89_REG_1 "VARIES" R0603B 509.001,205 r90 top (schematic designator R89)
R89_REG_2 "VARIES" R0603B 513.001,214 r90 top (schematic designator R89)
R89_REG_3 "VARIES" R0603B 513.001,223 r90 top (schematic designator R89)
R90_REG_1 "100k" R0603B 431.001,205 r90 top (schematic designator R90)
R90_REG_2 "100k" R0603B 434.001,214 r90 top (schematic designator R90)
R90_REG_3 "100k" R0603B 434.001,223 r90 top (schematic designator R90)
R91_REG_1 "100k" R0603B 402.001,205 r90 top value=10k (schematic designator R91)
R91_REG_2 "100k" R0603B 403.001,214 r90 top value=10k (schematic designator R91)
R91_REG_3 "100k" R0603B 403.001,223 r90 top value=10k (schematic designator R91)
R92_REG_1 "1k" R0603B 387.001,205 r90 top (schematic designator R92)
R92_REG_2 "1k" R0603B 388.001,214 r90 top (schematic designator R92)
R92_REG_3 "1k" R0603B 388.001,223 r90 top (schematic designator R92)
R93_REG_1 "1M" R0603B 373.001,205 r90 top (schematic designator R93)
R93_REG_2 "1M" R0603B 373.001,214 r90 top (schematic designator R93)
R93_REG_3 "1M" R0603B 373.001,223 r90 top (schematic designator R93)
R94 "12.4k" R0603B 449.001,120 r90 top
R95 "100k" R0603B 391.001,120 r90 top
R96 "1k" R0603B 397.001,120 r90 top
R97 "32.4k" R0603B 378.001,120 r90 top
R98 "1M" R0603B 373.001,120 r90 top
R99_PHY_0 "DNP" R0603B 251.25,244.5 r0 bottom (schematic designator R99)
R99_PHY_1 "DNP" R0603B 237.5,220.75 r270 bottom (schematic designator R99)
R99_PHY_2 "DNP" R0603B 217.5,220.75 r270 bottom (schematic designator R99)
R99_PHY_3 "DNP" R0603B 197.5,220.75 r270 bottom (schematic designator R99)
R99_PHY_4 "DNP" R0603B 177.5,220.75 r270 bottom (schematic designator R99)
R99_PHY_5 "DNP" R0603B 174.75,255.5 r180 bottom (schematic designator R99)
SW1 "KXT331LHS" FP-KXT331LHS-MFG 548.001,61 r0 top
SW2 "KXT331LHS" FP-KXT331LHS-MFG 554.001,61 r0 top
SW3_TCAN1146_0 "KXT331LHS" FP-KXT331LHS-MFG 530.001,296.001 r90 top (schematic designator SW3)
SW3_TCAN1146_1 "KXT331LHS" FP-KXT331LHS-MFG 526.001,307.001 r90 top (schematic designator SW3)
U1 "LAN8830-V/PSA" QFN50P700X700X100_HS-49N 286.001,159 r0 top
U2_PHY_0 "LAN8870T-I/PUA" QFN50P700X700X100_HS-49N 243,250 r90 top (schematic designator U2)
U2_PHY_1 "LAN8870T-I/PUA" QFN50P700X700X100_HS-49N 243,229 r0 top (schematic designator U2)
U2_PHY_2 "LAN8870T-I/PUA" QFN50P700X700X100_HS-49N 223,229 r0 top (schematic designator U2)
U2_PHY_3 "LAN8870T-I/PUA" QFN50P700X700X100_HS-49N 203,229 r0 top (schematic designator U2)
U2_PHY_4 "LAN8870T-I/PUA" QFN50P700X700X100_HS-49N 183,229 r0 top (schematic designator U2)
U2_PHY_5 "LAN8870T-I/PUA" QFN50P700X700X100_HS-49N 183,250 r270 top (schematic designator U2)
U3_SJA1150Q_PINOUT_0 "SJA1105QELY" SJA1105QELY-Footprint-1 996.001,251 r90 top (schematic designator U3)
U3_SJA1150Q_PINOUT_1 "SJA1105QELY" SJA1105QELY-Footprint-1 955.001,282.001 r90 top (schematic designator U3)
U4 "STM32H730VBT6" FP-LQFP100-1L-IPC_C 500.001,68 r0 top
U5 "74FCT3807SNDGI" NDG20S2_MFG 479.001,2 r0 top
U6 "ACS711KLCTR-12AB-T" FP-LC-8-IPC_C 429.001,95 r0 top
U7_OR_0 "LM74910HQRGERQ1" QFN50P400X400X100_HS-25N 524.001,139 r90 top (schematic designator U7)
U7_OR_1 "LM74910HQRGERQ1" QFN50P400X400X100_HS-25N 90.001,-48 r90 top (schematic designator U7)
U8_TCAN1146_0 "TCAN1146DYYRQ1" TCAN1146DYYRQ1-Footprint-1 691.001,296.001 r90 top (schematic designator U8)
U8_TCAN1146_1 "TCAN1146DYYRQ1" TCAN1146DYYRQ1-Footprint-1 684.001,308.001 r90 top (schematic designator U8)
U9 "LM61495Q3RPHRQ1" FP-RPH0016A-MFG 476.001,105 r0 top
U10_REG_1 "MCP1726T-ADJE/MF" DFN-MF8 524.001,207 r90 top (schematic designator U10)
U10_REG_2 "MCP1726T-ADJE/MF" DFN-MF8 529.001,215 r90 top (schematic designator U10)
U10_REG_3 "MCP1726T-ADJE/MF" DFN-MF8 529.001,224 r90 top (schematic designator U10)
U11 "AP64502QSP-13" SOIC127P600X163_HS-9N 488.001,121 r0 top
Y1 "ABM8G-25.000MHZ-18-D2Y-T" FP-ABM8G-MFG 604.001,62 r0 top
Y2 "ECS-.327-12.5-1210-TR" FP-ECX-1210-MFG 585.001,61 r0 top
Y3 "ASCO-25.000MHZ-EK-T3" FP-ASCO-MFG 380.001,2 r0 top

## Footprints (in the part's own frame and the unit in brackets; to place one, negate y for a bottom-side part, rotate by r counter-clockwise, add the part's x,y. Pads: shape width x height; smd on the part's side, far side on the other; paste and mask are expansions set on the pad)
3220-10-0300-00-Footprint-1 [mm]
  rrect50% 2.2x0.65 smd: 1(-1.73,2.54) 2(1.73,2.54) 3(-1.73,1.27) 4(1.73,1.27) 5(-1.73,0) 6(1.73,0) 7(-1.73,-1.27) 8(1.73,-1.27) 9(-1.73,-2.54) 10(1.73,-2.54)
  silkscreen extent -2.5,-6.35 2.5,6.35, body extent -2.74,-6.39 2.76,6.31, height 5.22
776266-1-Footprint-1 [mm]
  rect 2.625x2.625 / inner round 2.625 / far side rect 2.625x2.625 hole 1.75: 1(-8,4)
  round 2.625 hole 1.75: 2(-4,4) 3(0,4) 4(4,4) 5(8,4) 6(-6,0) 7(-2,0) 8(2,0) 9(6,0) 10(-8,-4) 11(-4,-4) 12(0,-4) 13(4,-4) 14(8,-4)
  round 2.85 hole 2.85 unplated: ""(-14.5,-0.5) ""(14.5,-0.5)
  silkscreen extent -24.4,-31.85 24.4,7.2, body extent -24.4,-31.75 24.4,6.05, height 27.78
DFN-MF8 [mm] "SON, 8-Leads, Body 3x3mm, Pitch 0.65mm, Microchip Recommended"
  rect 0.65x0.35 smd: 1(-1.55,0.975) 2(-1.55,0.325) 3(-1.55,-0.325) 4(-1.55,-0.975) 5(1.55,-0.975) 6(1.55,-0.325) 7(1.55,0.325) 8(1.55,0.975)
  rect 1.55x2.4 smd: 9(0,0)
  silkscreen extent -2.47,-1.7 1.7,1.82, body extent -1.55,-1.55 1.55,1.55, height 1
DIOD-SOT323-3_V [mm] "SOT323, 3-Leads, Body 2.2x1.35mm, Pitch 0.65mm"
  rect 0.9x0.7 smd: 1(-0.95,0.65) 2(-0.95,-0.65) 3(0.95,0)
  silkscreen extent -1.07,-1.1 0.67,1.67, body extent -1.1,-1.1 1.1,1.1, height 1.07
FP-0402-L_1_0_0_05-W_0_5-IPC_A [mm]
  rect 0.715x0.672 smd paste+0 mask+0: 1(-0.479,0) 2(0.479,0)
  silkscreen extent -0.84,-0.74 0.84,0.74, body extent -1.04,-0.54 1.04,0.54, height 0.25
FP-0805-L_2_01_0_2-W_1_25-IPC_B [mm]
  rect 1.305x1.456 smd paste+0 mask+0: 1(-0.806,0) 2(0.806,0)
  silkscreen extent -1.46,-1.13 1.46,1.13, body extent -1.71,-0.98 1.71,0.98, height 0.25
FP-1210-L_3_2_0_3-W_2_5_0-IPC_B [mm]
  rect 1.553x2.706 smd paste+0 mask+0: 1(-1.325,0) 2(1.325,0)
  silkscreen extent -0.25,-1.35 0.25,1.35, body extent -2.35,-1.6 2.35,1.6, height 0.25
FP-1210-L_3_3_0_4-W_2_5_0-MFG [mm]
  rect 1x2.5 smd paste+0 mask+0: 1(-1.5,0) 2(1.5,0)
  silkscreen extent -0.62,-1.4 0.62,1.4, body extent -2.1,-1.5 2.1,1.5, height 0.25
FP-ABM8G-MFG [mm]
  rect 1.4x1.2 smd paste+0 mask+0: 1(-1.1,-0.85) 2(1.1,-0.85) 3(1.1,0.85) 4(-1.1,0.85)
  silkscreen extent -2.47,-1.83 1.6,1.83, body extent -1.9,-1.55 1.9,1.55, height 0.25
FP-AC1210-0_85-MFG [mm]
  rect 1x2.7 smd paste+0 mask+0: 1(-1.5,0) 2(1.5,0)
  silkscreen extent -0.63,-1.35 0.63,1.35, body extent -2.2,-1.7 2.2,1.7, height 0.25
FP-ACT1210G-800-2P-TL10-MFG [mm]
  rect 1.05x0.6 smd paste+0 mask+0: 1(-1.525,0.5) 2(-1.525,-0.5) 3(1.525,-0.5) 4(1.525,0.5)
  silkscreen extent -2.73,-1.35 1.7,1.35, body extent -2.15,-1.45 2.15,1.45, height 0.25
FP-ASCO-MFG [mm]
  rect 0.6x0.5 smd paste+0 mask+0: 1(-0.55,-0.4) 2(0.55,-0.4) 3(0.55,0.4) 4(-0.55,0.4)
  silkscreen extent -1.22,-1.35 1.22,0.65, body extent -0.95,-0.75 0.95,0.75, height 0.25
FP-BLM15-0_05-IPC_A [mm]
  rect 0.715x0.672 smd paste+0 mask+0: 1(-0.479,0) 2(0.479,0)
  silkscreen extent -0.84,-0.74 0.84,0.74, body extent -1.04,-0.54 1.04,0.54, height 0.25
FP-BLM18-0_15-t0_8-IPC_B [mm]
  rect 1.106x0.958 smd paste+0 mask+0: 1(-0.676,0) 2(0.676,0)
  silkscreen extent -1.23,-0.88 1.23,0.88, body extent -1.48,-0.73 1.48,0.73, height 0.25
FP-C0805C475J4RACAUTO-MFG [mm]
  rect 0.95x1.35 smd paste+0 mask+0: 1(-0.75,0) 2(0.75,0)
  silkscreen extent -1.15,-1.05 1.15,1.05, body extent -1.4,-0.85 1.4,0.85, height 0.25
FP-C3225-250-0_4-MFG [mm]
  rect 1.1x2.2 smd paste+0 mask+0: 1(-1.65,0) 2(1.65,0)
  silkscreen extent -0.72,-1.4 0.72,1.4, body extent -2.3,-1.5 2.3,1.5, height 0.25
FP-CGA9P-IPC_A [mm]
  rect 1.153x5.503 smd paste+0 mask+0: 1(-3.025,0) 2(3.025,0)
  silkscreen extent -2.15,-2.75 2.15,2.75, body extent -4.1,-3.25 4.1,3.25, height 0.25
FP-E6S20F-40MT5-A-MFG [mm]
  round 2.5 hole 1.65 paste-2539.97 mask+0: 1(-11.5,9.1) 2(11.5,9.1) 3(-11.5,-1.1) 4(11.5,-1.1)
  rect 1.1x1.1 hole 0.6 paste-2539.97 mask+0: 1-1(-9,5.27)
  round 1.1 hole 0.6 paste-2539.97 mask+0: 1-2(-7,5.27) 2-1(-1,5.27) 2-2(1,5.27) 3-1(7,5.27) 3-2(9,5.27) 4-1(9,0.77) 4-2(7,0.77) 5-1(1,0.77) 5-2(-1,0.77) 6-1(-7,0.77) 6-2(-9,0.77)
  silkscreen extent -13.6,-14.25 13.6,10.86, body extent -13.7,-14.35 13.7,10.45, height 0.25
FP-ECX-1210-MFG [mm]
  rect 0.575x1.14 smd paste+0 mask+0: 1(-0.413,0) 2(0.413,0)
  silkscreen extent -0.65,-0.95 0.65,0.95, body extent -0.8,-0.67 0.8,0.67, height 0.25
FP-FKC-MFG [mm]
  rect 2.8x1.6 smd paste+0 mask+0: 1(-2.15,0) 2(2.15,0)
  silkscreen extent -4.22,-2.75 2.75,2.75, body extent -3.8,-3 3.8,3, height 0.25
FP-GRM32E-0_3-0_2-IPC_C [mm]
  rect 1.703x2.606 smd paste+0 mask+0: 1(-1.051,0) 2(1.051,0)
  silkscreen extent -1.9,-1.75 1.9,1.75, body extent -2,-1.45 2,1.45, height 0.25
FP-KRL6432E-MFG [mm]
  rect 1x6.6 smd paste+0 mask+0: 1(-1.6,0) 2(1.6,0)
  silkscreen extent -0.72,-3.25 0.72,3.25, body extent -2.2,-3.4 2.2,3.4, height 0.25
FP-KXT331LHS-MFG [mm]
  rect 0.55x1.5 smd paste+0 mask+0: 1(-1.625,0) 2(1.625,0)
  silkscreen extent -1.65,-1.15 1.65,1.15, body extent -2,-1.25 2,1.25, height 0.25
FP-LC-8-IPC_C [mm]
  rect 1.874x0.542 smd paste+0 mask+0: 1(-2.316,1.905)
  rrect100% 1.874x0.542 smd paste+0 mask+0: 2(-2.316,0.635) 3(-2.316,-0.635) 4(-2.316,-1.905) 5(2.316,-1.905) 6(2.316,-0.635) 7(2.316,0.635) 8(2.316,1.905)
  silkscreen extent -3.97,-2.45 0.88,2.45, body extent -3.35,-2.55 3.35,2.55, height 0.25
FP-LQFP100-1L-IPC_C [mm]
  rect 1.355x0.212 smd paste+0 mask+0: 1(-7.575,6)
  rrect100% 1.355x0.212 smd paste+0 mask+0: 2(-7.575,5.5) 3(-7.575,5) 4(-7.575,4.5) 5(-7.575,4) 6(-7.575,3.5) 7(-7.575,3) 8(-7.575,2.5) 9(-7.575,2) 10(-7.575,1.5) 11(-7.575,1) 12(-7.575,0.5) 13(-7.575,0) 14(-7.575,-0.5) 15(-7.575,-1) 16(-7.575,-1.5) 17(-7.575,-2) 18(-7.575,-2.5) 19(-7.575,-3) 20(-7.575,-3.5) 21(-7.575,-4) 22(-7.575,-4.5) 23(-7.575,-5) 24(-7.575,-5.5) 25(-7.575,-6) 51(7.575,-6) 52(7.575,-5.5) 53(7.575,-5) 54(7.575,-4.5) 55(7.575,-4) 56(7.575,-3.5) 57(7.575,-3) 58(7.575,-2.5) 59(7.575,-2) 60(7.575,-1.5) 61(7.575,-1) 62(7.575,-0.5) 63(7.575,0) 64(7.575,0.5) 65(7.575,1) 66(7.575,1.5) 67(7.575,2) 68(7.575,2.5) 69(7.575,3) 70(7.575,3.5) 71(7.575,4) 72(7.575,4.5) 73(7.575,5) 74(7.575,5.5) 75(7.575,6)
  rrect100% 0.212x1.355 smd paste+0 mask+0: 26(-6,-7.575) 27(-5.5,-7.575) 28(-5,-7.575) 29(-4.5,-7.575) 30(-4,-7.575) 31(-3.5,-7.575) 32(-3,-7.575) 33(-2.5,-7.575) 34(-2,-7.575) 35(-1.5,-7.575) 36(-1,-7.575) 37(-0.5,-7.575) 38(0,-7.575) 39(0.5,-7.575) 40(1,-7.575) 41(1.5,-7.575) 42(2,-7.575) 43(2.5,-7.575) 44(3,-7.575) 45(3.5,-7.575) 46(4,-7.575) 47(4.5,-7.575) 48(5,-7.575) 49(5.5,-7.575) 50(6,-7.575) 76(6,7.575) 77(5.5,7.575) 78(5,7.575) 79(4.5,7.575) 80(4,7.575) 81(3.5,7.575) 82(3,7.575) 83(2.5,7.575) 84(2,7.575) 85(1.5,7.575) 86(1,7.575) 87(0.5,7.575) 88(0,7.575) 89(-0.5,7.575) 90(-1,7.575) 91(-1.5,7.575) 92(-2,7.575) 93(-2.5,7.575) 94(-3,7.575) 95(-3.5,7.575) 96(-4,7.575) 97(-4.5,7.575) 98(-5,7.575) 99(-5.5,7.575) 100(-6,7.575)
  silkscreen extent -7.7,-6.25 6.25,6.83, body extent -8.35,-8.35 8.35,8.35, height 0.25
FP-PG-TDSON-8-MFG [mm]
  rect 3.2x1.1 smd paste-1000 mask-1000: 1-2-3(-0.715,-2.775)
  rect 0.5x1.1 smd paste-1000 mask+0: 4(1.905,-2.775)
  rect 4.41x4.55 smd paste-1000 mask-1000: 5-6-7-8(0,1.05)
  silkscreen extent -2.78,-4.08 2.78,3.08, body extent -2.82,-3.42 2.82,3.42, height 0.25